# Altium PCB WheatstoneBridge.PcbDoc
Units mm, origin at the board's own origin, x right, y up, seen from the top; angles counter-clockwise.
Board outline 70 x 45 mm, 2 copper layers (Top Layer, Bottom Layer), stack 1.671 mm thick; 66 components, 51 nets, 217 pads, 151 vias.
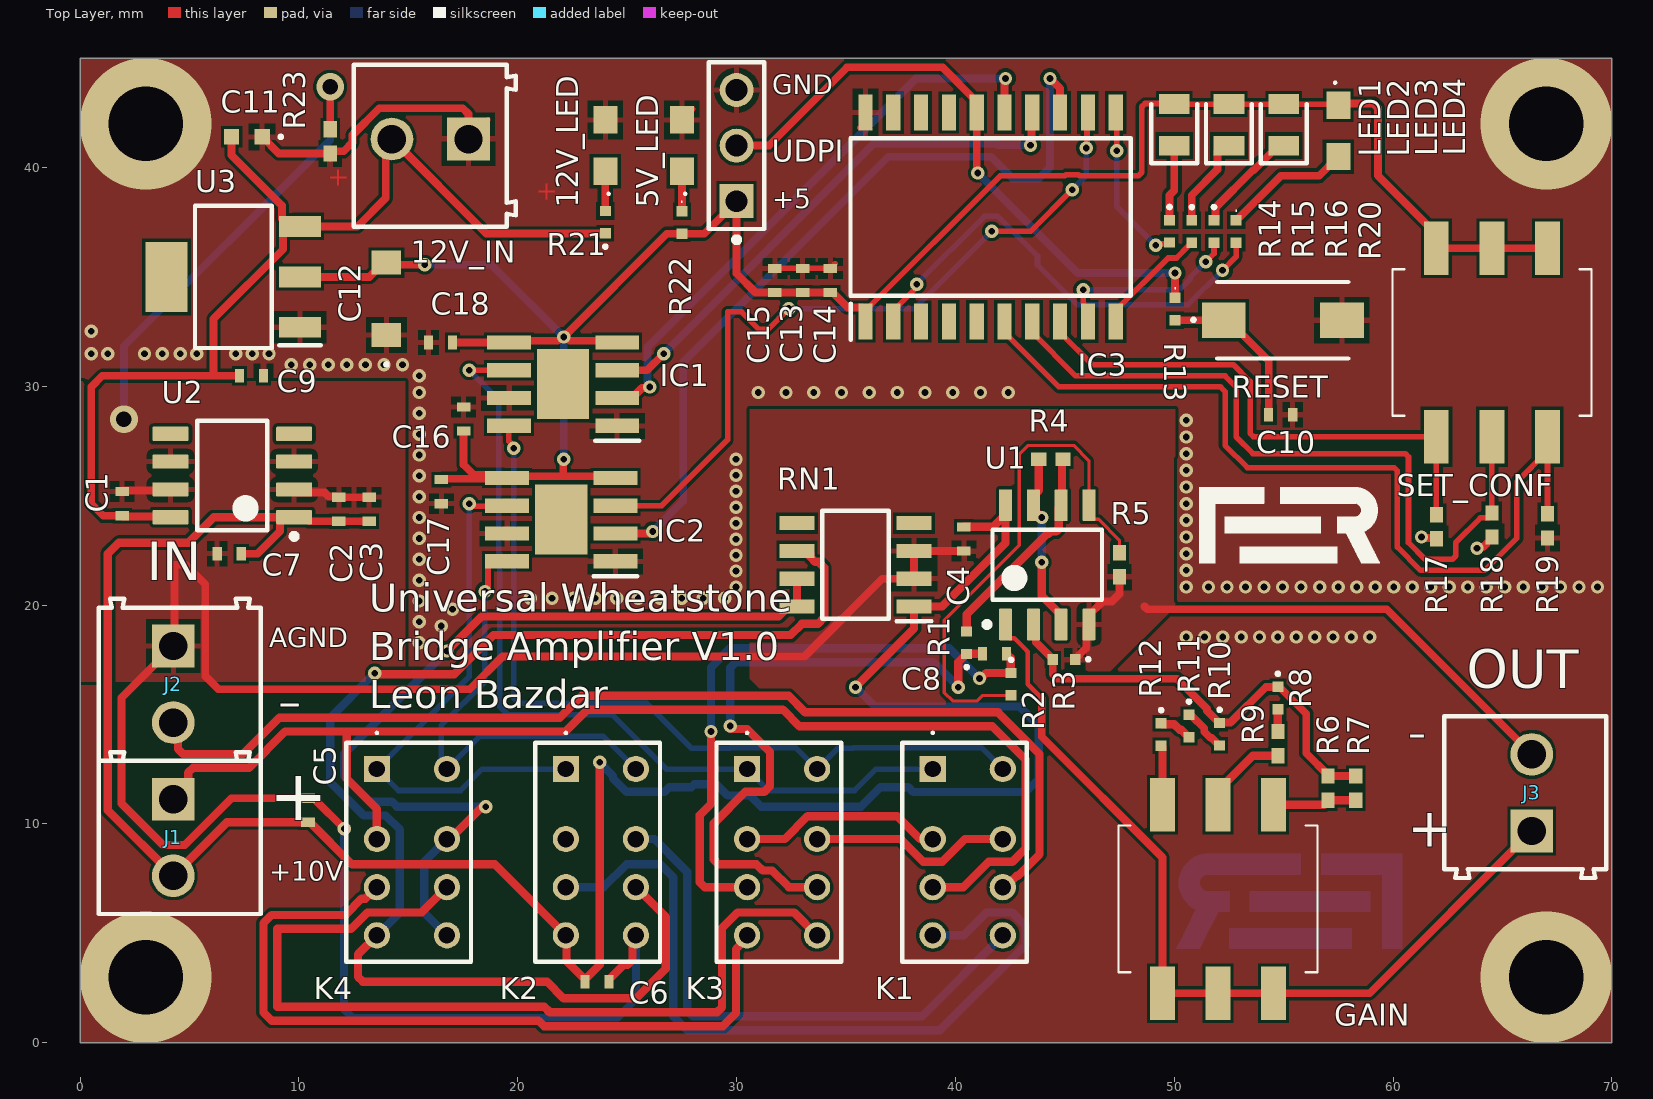
[diagram p0: Top Layer view]
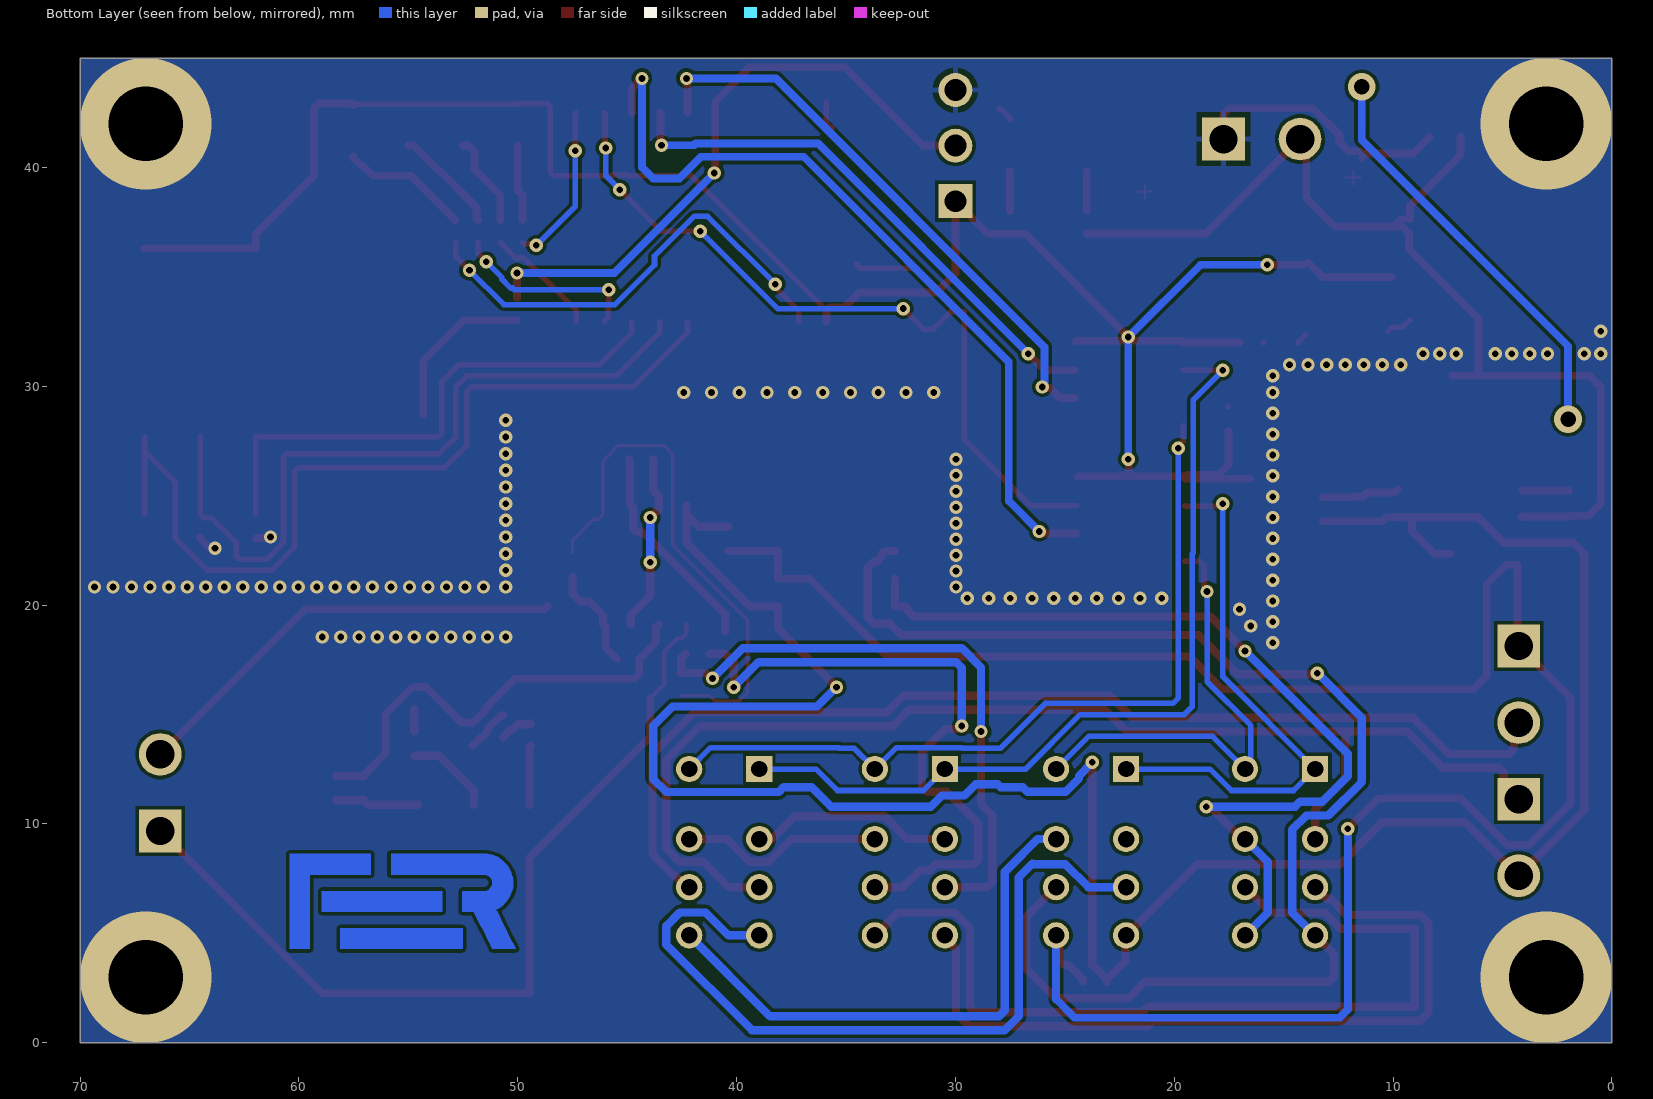
[diagram p1: Bottom Layer view, seen from below]
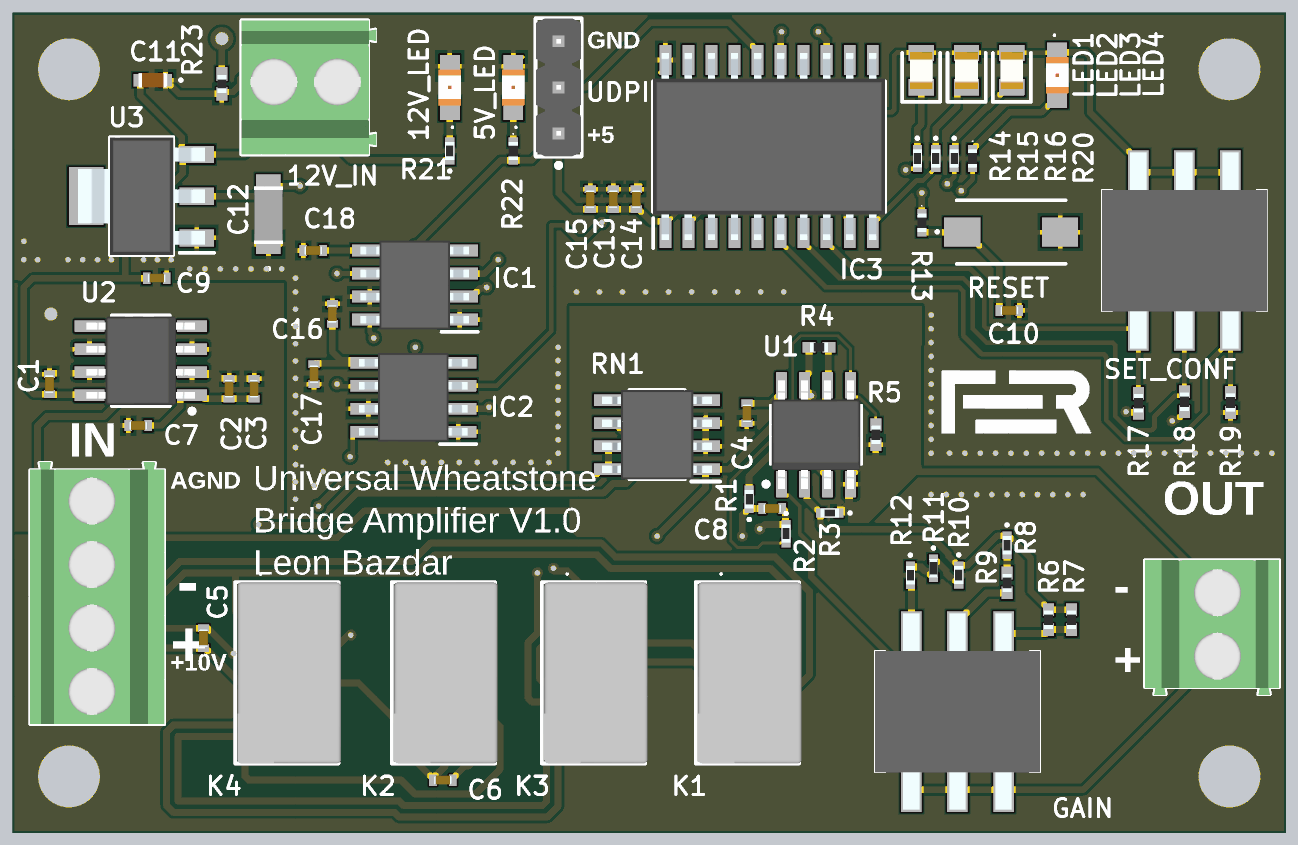
[diagram p2: 3D render of the assembled board from above, using the file's embedded part models]

## Layer stack, top to bottom
Top Solder: solder mask 0.0102, Solder Resist, Dk 3.5
Top Layer: signal copper 0.0356
Dielectric 1: dielectric 1.6, FR-4, Dk 4.8
Bottom Layer: signal copper 0.0356
Bottom Solder: solder mask 0.0102, Solder Resist, Dk 3.5

## Board outline
0,0 70,0 70,45 0,45

## Design rules (kind name [scope] priority, off if disabled: settings)
Clearance [All] p1: gap=0.152 ignorepadtopadclearanceinfootprint=FALSE except(0: Arc-Hole Track-Hole SMDPad-Hole THPad-Hole Via-Hole Fill-Hole Poly-Hole Region-Hole Text-Hole)
ComponentClearance ComponentClearance_1 [InComponent('J1') vs InComponent('J2')] p1: gap=0 collisioncheckmode=3 verticalgap=0 showdistances=TRUE
ComponentClearance [All] p2: gap=0.254 collisioncheckmode=3 verticalgap=0.254 showdistances=TRUE
DiffPairsRouting [All] p1: maxlimit=0.254 minlimit=0.254 mostfreqgap=0.254 toplayer_minwidth=0.381 toplayer_maxwidth=0.381 toplayer_prefwidth=0.381 bottomlayer_minwidth=0.381 bottomlayer_maxwidth=0.381 bottomlayer_prefwidth=0.381 maxuncoupledlength=12.7
HoleSize [All] p1: absolutevalues=TRUE maxlimit=25.4 minlimit=0.025 maxpercent=80.000 minpercent=20.000
MinimumSolderMaskSliver [All] p1: minsoldermaskwidth=0
PolygonConnect PolygonConnect_2 [IsVia vs IsNamedPolygon('AGND_L01_P000')OR IsNamedPolygon('AGND_L01_P001')] p1: connectstyle=Direct reliefconductorwidth=0.254 reliefentries=4 polygonreliefangle="90 Angle" airgapwidth=0.254
PolygonConnect PolygonConnect_1 [IsVia vs IsNamedPolygon('GND_L01_P003')Or IsNamedPolygon('GND_L02_P002')] p2: connectstyle=Direct reliefconductorwidth=0.254 reliefentries=4 polygonreliefangle="90 Angle" airgapwidth=0.254
PolygonConnect [All] p3: connectstyle=Relief reliefconductorwidth=0.254 reliefentries=4 polygonreliefangle="90 Angle" airgapwidth=0.254
RoutingVias [All] p1: holewidth=0.305 width=0.61 viastyle="Through Hole" minholewidth=0.305 minwidth=0.356 maxholewidth=2.54 maxwidth=5.08
SilkToSilkClearance [All] p1: silktosilkclearance=0.152
SilkToSolderMaskClearance [IsPad] p1: minsilkscreentomaskgap=0.152 clearancetoexposedcopper=TRUE
SolderMaskExpansion [All] p1: expansion=0.102 istentingtop=FALSE
Width [All] p1: maxlimit=2.54 minlimit=0.152 preferedwidth=0.254
24 further rules are at their usual default settings.

## Classes and differential pairs
component class "U_Relay Control": C16 C17 IC1 IC2
component class U_PSU: 5V_LED 12V_LED C1 C2 C3 C4 C5 C6 C7 C9 C11 C12 C18 R21 R22 R23 U2 U3
component class U_MCU: C10 C13 C14 C15 IC3 LED1 LED2 LED3 LED4 R13 R14 R15 R16 R17 R18 R19 R20 RESET SET_CONF
component class U_Connectors: 12V_IN J1 J2 J3 UDPI
component class "U_Bridge & Switching": K1 K2 K3 K4 RN1
component class U_Amplifier: C8 GAIN R1 R2 R3 R4 R5 R6 R7 R8 R9 R10 R11 R12 U1
differential pair IN: +IN_P -IN_N
differential pair PART_BR_IN: +PART_BR_IN_P -PART_BR_IN_N
differential pair PART2_BR: +PART2_BR_P -PART2_BR_N
differential pair FULL_BR: +FULL_BR_P -FULL_BR_N
differential pair AMP_IN: +AMP_IN_P -AMP_IN_N

## Components (designator, comment, footprint, x,y, rotation, side; value= is the part's Value field where it differs from the comment)
5V_LED "Red" APT2012SECKJ3PRV 27.5,41 r90 top (schematic designator 5V_PWR)
12V_IN "691214110002" 691214110002 16,41 r180 top (schematic designator PWR_IN)
12V_LED "Red" APT2012SECKJ3PRV 24,41 r90 top (schematic designator 12V_PWR)
C1 "1uF" CAPC1005X55N 1.922,24.638 r270 top
C2 "1uF" CAPC1005X55N 11.828,24.384 r270 top
C3 "100nF" CAPC1005X55N 13.208,24.384 r270 top
C4 "100nF" CAPC1005X55N 40.386,23.029 r90 top
C5 "100nF" CAPC1005X55N 10.414,10.626 r270 top
C6 "100nF" CAPC1005X55N 23.622,2.794 r180 top
C7 "100nF" CAPC1005X55N 6.816,22.352 r0 top
C8 "1nF C0G" CAPC1005X55N 41.783,17.78 r180 top
C9 "1uF" CAPC1005X55N 7.832,30.48 r180 top
C10 "100nF" CAPC1005X55N 54.864,28.702 r180 top
C11 "10uF" C1608_Commercial 7.62,41.402 r180 top
C12 "22uF" C3216_Commercial 14,34 r90 top
C13 "1uF" CAPC1005X55N 33.02,34.84 r270 top
C14 "100nF" CAPC1005X55N 34.29,34.84 r270 top
C15 "1nF" CAPC1005X55N 31.75,34.84 r270 top
C16 "100nF" CAPC1005X55N 17.526,28.507 r270 top
C17 "100nF" CAPC1005X55N 16.51,25.188 r90 top
C18 "100nF" CAPC1005X55N 16.468,32.004 r0 top
GAIN "DIP SWITCH" 2193LPSTR 52,6.575 r180 top
IC1 "TB67H451FNG,EL" SOIC127P600X170-9N 22.069,30.099 r180 top
IC2 "TB67H451FNG,EL" SOIC127P600X170-9N 21.988,23.908 r180 top
IC3 "ATTINY1626-SF" SOIC127P1030X265-20N 41.608,37.736 r90 top
J1 "691214110002" 691214110002 4.56,9.385 r270 top
J2 "691214110002" 691214110002 4.56,16.385 r270 top
J3 "691214110002" 691214110002 66.04,11.43 r90 top
K1 "2-1462038-1" 214620381 38.964,12.512 r270 top
K2 "2-1462038-1" 214620381 22.2,12.512 r270 top
K3 "2-1462038-1" 214620381 30.48,12.512 r270 top
K4 "2-1462038-1" 214620381 13.564,12.512 r270 top
LED1 "Blue" LEDC2012X85N 50,41.95 r90 top
LED2 "Blue" LEDC2012X85N 52.5,41.95 r90 top
LED3 "Blue" LEDC2012X85N 55,41.95 r90 top
LED4 "Red" APT2012SECKJ3PRV 57.5,41.675 r270 top
R1 "1k" ERA2V_(0402) 40.513,18.283 r90 top
R2 "1k" ERA2V_(0402) 42.545,16.388 r270 top
R3 "1k" ERA2V_(0402) 44.958,17.526 r180 top
R4 "150k" RESC1005X35N 44.365,26.67 r180 top
R5 "150k" RESC1005X35N 47.498,21.844 r90 top
R6 "18k" RESC1005X35N 57.023,11.642 r270 top
R7 "18k" RESC1005X35N 58.293,11.642 r270 top
R8 "1k" ERA2V_(0402) 54.737,15.752 r270 top
R9 "18k" RESC1005X35N 54.737,13.674 r270 top
R10 "1k" ERA2V_(0402) 52.07,14.101 r270 top
R11 "47k" ERA2A_(0402) 50.673,14.483 r270 top
R12 "1k" ERA2V_(0402) 49.403,14.092 r270 top
R13 "330R" ERJ2RKD1004X 50.038,33.532 r270 top
R14 "1k" ERA2V_(0402) 49.784,37.084 r270 top
R15 "1k" ERA2V_(0402) 50.8,37.079 r270 top
R16 "1k" ERA2V_(0402) 51.816,37.079 r270 top
R17 "18k" RESC1005X35N 61.976,23.58 r90 top
R18 "18k" RESC1005X35N 64.516,23.664 r90 top
R19 "18k" RESC1005X35N 67.056,23.622 r90 top
R20 "330R" ERJ2RKD1004X 52.832,37.08 r270 top
R21 "1k" ERA2V_(0402) 24,37.5 r90 top
R22 "330R" ERJ2RKD1004X 27.5,37.488 r270 top
R23 "0R" RESC1005X40N 11.43,41.19 r90 top
RESET "SW1" 95C04A3GWRT 54.96,33.02 r0 top
RN1 "ORNTA1001BT1" SOIC127P607X173-8N 35.433,21.844 r180 top
SET_CONF "DIP SWITCH" 2193LPSTR 64.516,32.004 r0 top
U1 "LMC6482IM/NOPB" D0008A_N 44.196,21.844 r90 top
U2 "TL750L10CD" D0008A_M 6.958,25.926 r180 top
U3 "AZ1117H-5.0TRG1" SOT230P700X180-4N 7,35 r180 top
UDPI "90120-0123" FP-90120-0123-MFG 30,41 r90 top

## Footprints (in the part's own frame and the unit in brackets; to place one, negate y for a bottom-side part, rotate by r counter-clockwise, add the part's x,y. Pads: shape width x height; smd on the part's side, far side on the other; paste and mask are expansions set on the pad)
95C04A3GWRT [mm]
  rect 2x1.6 smd: 1(-2.7,0) 2(2.7,0)
  silkscreen extent -4.13,-1.75 3,1.75
2193LPSTR [mm]
  rect 1.13x2.44 smd: 1(-2.54,-4.305) 2(0,-4.305) 3(2.54,-4.305) 4(2.54,4.305) 5(0,4.305) 6(-2.54,4.305)
  silkscreen extent -4.55,-3.35 4.54,3.35, body extent -4.54,-5.41 4.54,5.41, height 4.05
214620381 [mm]
  rect 1.2x1.2 hole 0.75: 1(0,0)
  round 1.2 hole 0.75: 2(3.2,0) 3(5.4,0) 4(7.6,0) 5(7.6,3.2) 6(5.4,3.2) 7(3.2,3.2) 8(0,3.2)
  silkscreen extent -1.7,-1.4 8.8,4.3, body extent -1.2,-1.27 8.8,4.43, height 5.7
691214110002 [mm] "3.50 mm Horizontal Entry Modular, 2p"
  rect 1.95x1.95 hole 1.3: 1(-1.75,-0.3)
  round 1.95 hole 1.3: 2(1.75,-0.3)
  silkscreen extent -3.9,-3.7 3.5,3.7, body extent -3.95,-3.7 3.5,3.7, height 8.55
APT2012SECKJ3PRV [mm]
  rect 1.25x1.1 smd: 1(-1.175,0) 2(1.175,0)
  silkscreen extent -2.25,-0.2 -2.15,-0.1, body extent -1,-0.63 1,0.63, height 0.85
C1608_Commercial [mm]
  rect 0.7x0.7 smd: 1(-0.7,0) 2(0.7,0)
  silkscreen extent -1.6,-0.05 -1.5,0.05, body extent -0.8,-0.4 0.8,0.4, height 0.8
C3216_Commercial [mm]
  rect 1.1x1.35 smd: 1(-1.65,0) 2(1.65,0)
  silkscreen extent -3.05,-0.05 -2.95,0.05, body extent -1.65,-0.8 1.55,0.8, height 1.6
CAPC1005X55N [mm]
  rect 0.42x0.62 smd: 1(-0.55,0) 2(0.55,0)
  body extent -0.5,-0.25 0.5,0.25, height 0.55
D0008A_M [mm] "SOIC, 8-Leads, Body 5x4mm, Pitch 1.27mm, IPC Low Density"
  rrect15% 1.65x0.65 smd: 1(-2.825,1.905) 2(-2.825,0.635) 3(-2.825,-0.635) 4(-2.825,-1.905) 5(2.825,-1.905) 6(2.825,-0.635) 7(2.825,0.635) 8(2.825,1.905)
  silkscreen extent -2.95,-2.5 1.6,2.9, body extent -3,-2.45 3,2.45, height 1.63
D0008A_N [mm] "SOIC, 8-Leads, Body 5x4mm, Pitch 1.27mm, IPC Medium Density"
  rrect17% 1.45x0.6 smd: 1(-2.725,1.905) 2(-2.725,0.635) 3(-2.725,-0.635) 4(-2.725,-1.905) 5(2.725,-1.905) 6(2.725,-0.635) 7(2.725,0.635) 8(2.725,1.905)
  silkscreen extent -2.85,-2.5 1.6,2.88, body extent -3,-2.45 3,2.45, height 1.63
ERA2A_(0402) [mm]
  rect 0.475x0.5 smd: 1(-0.512,0) 2(0.513,0)
  silkscreen extent -1.16,-0.05 -1.06,0.05, body extent -0.5,-0.25 0.5,0.25, height 0.35
ERA2V_(0402) [mm]
  rect 0.475x0.5 smd: 1(-0.513,0) 2(0.513,0)
  silkscreen extent -1.16,-0.05 -1.06,0.05, body extent -0.5,-0.25 0.5,0.25, height 0.36
ERJ2RKD1004X [mm]
  rect 0.475x0.5 smd: 1(-0.512,0) 2(0.512,0)
  silkscreen extent -0.97,-0.03 -0.93,0.03, body extent -0.5,-0.25 0.5,0.25, height 0.35
FP-90120-0123-MFG [mm]
  rect 1.55x1.55 hole 1 paste-1000 mask+0: 1(-2.54,0)
  round 1.55 hole 1 paste-1000 mask+0: 2(0,0) 3(2.54,0)
  silkscreen extent -4.42,-1.27 3.81,1.27, body extent -3.91,-1.37 3.91,1.37, height 0.25
LEDC2012X85N [mm]
  rect 0.9x1.4 smd: 1(-0.95,0) 2(0.95,0)
  silkscreen extent -1.75,-1.05 0.95,1.05, body extent -1.05,-0.63 0.99,0.63, height 0.77
RESC1005X35N [mm]
  rect 0.7x0.6 smd: 1(-0.55,0) 2(0.55,0)
  body extent -0.5,-0.25 0.5,0.25, height 0.35
RESC1005X40N [mm]
  rect 0.75x0.6 smd: 1(-0.55,0) 2(0.55,0)
  body extent -0.5,-0.25 0.5,0.25, height 0.4
SOIC127P600X170-9N [mm]
  rect 2x0.65 smd: 1(-2.475,1.905) 2(-2.475,0.635) 3(-2.475,-0.635) 4(-2.475,-1.905) 5(2.475,-1.905) 6(2.475,-0.635) 7(2.475,0.635) 8(2.475,1.905)
  rect 2.39x3.2 smd: 9(0,0)
  silkscreen extent -3.48,2.58 -1.48,2.58, body extent -3,-2.45 3,2.45, height 1.7
SOIC127P607X173-8N [mm]
  rect 1.6x0.65 smd: 1(-2.675,1.905) 2(-2.675,0.635) 3(-2.675,-0.635) 4(-2.675,-1.905) 5(2.675,-1.905) 6(2.675,-0.635) 7(2.675,0.635) 8(2.675,1.905)
  silkscreen extent -3.47,-2.47 1.52,2.58, body extent -3.04,-2.46 3.04,2.46, height 1.73
SOIC127P1030X265-20N [mm]
  rect 1.65x0.65 smd: 1(-4.775,5.715) 2(-4.775,4.445) 3(-4.775,3.175) 4(-4.775,1.905) 5(-4.775,0.635) 6(-4.775,-0.635) 7(-4.775,-1.905) 8(-4.775,-3.175) 9(-4.775,-4.445) 10(-4.775,-5.715) 11(4.775,-5.715) 12(4.775,-4.445) 13(4.775,-3.175) 14(4.775,-1.905) 15(4.775,-0.635) 16(4.775,0.635) 17(4.775,1.905) 18(4.775,3.175) 19(4.775,4.445) 20(4.775,5.715)
  silkscreen extent -5.6,-6.4 3.6,6.4, body extent -5.15,-6.4 5.15,6.4, height 2.65
SOT230P700X180-4N [mm]
  rect 1.9x0.95 smd: 1(-3.05,2.3) 2(-3.05,0) 3(-3.05,-2.3)
  rect 1.9x3.2 smd: 4(3.05,0)
  silkscreen extent -4,-3.25 1.75,3.25, body extent -3.5,-3.25 3.5,3.25, height 1.8

## Part data
5V_LED 12V_LED LED4: library part APT2012SECK_J3-PRV, "LED", Manufacturer_Name=Kingbright, Manufacturer_Part_Number=APT2012SECK/J3-PRV, Datasheet Link=https://www.mouser.de/datasheet/2/216/APT2012SECK-J3-PRV-1173389.pdf, Height=0.85mm
12V_IN J1 J2 J3: library part CMP-1502-02464-1, "Serie 2141 - 3.50 mm Horizontal Entry Modular with Rising Cage Clamp WR-TBL, 2 pin", Manufacturer="Wurth Elektronik", Operating Temperature=-40to105degC, Datasheet URL=http://katalog.we-online.de/em/datasheet/6912141100xx.pdf, Manufacturer URL=http://www.we-online.de, Mounting Technology=THT, Package Reference=691214110002, Packaging=Box, Part Number=691214110002, Pin Number=2, Pitch=3.50mm, Publisher=WurthElektronik
C1 C2 C9 C13: library part GRT155C81E105KE13D, "Capacitor", Manufacturer_Name="Murata Electronics", Datasheet Link=https://psearch.en.murata.com/capacitor/product/GRT155C81E105KE13%23.html, Height=0.55mm, Manufacturer_Part_Number=GRT155C81E105KE13D
C3 C4 C5 C6 C7 C10 C14 C16 C17 C18: library part GCM155L81E104KE02D, "Capacitor", Manufacturer_Name="Murata Electronics", Datasheet Link=https://psearch.en.murata.com/capacitor/product/GCM155L81E104KE02%23.html, Height=0.55mm, Manufacturer_Part_Number=GCM155L81E104KE02D
C8 C15: library part CGA2B2C0G1H102J050BE, "Capacitor", Manufacturer_Name=TDK, Datasheet Link=https://product.tdk.com/system/files/dam/doc/product/capacitor/ceramic/mlcc/catalog/mlcc_automotive_soft_en.pdf, Height=0.55mm, Manufacturer_Part_Number=CGA2B2C0G1H102J050BE
C11: library part C1608JB1E106M080AC, "Capacitor", Manufacturer_Name=TDK, Datasheet Link=https://product.tdk.com/system/files/dam/doc/product/capacitor/ceramic/mlcc/catalog/mlcc_commercial_general_en.pdf, Height=0.9mm, Manufacturer_Part_Number=C1608JB1E106M080AC
C12: library part C3216X6S1E226M160AC, "Capacitor", Manufacturer_Name=TDK, Datasheet Link=https://product.tdk.com/system/files/dam/doc/product/capacitor/ceramic/mlcc/catalog/mlcc_commercial_general_en.pdf, Height=0.75mm, Manufacturer_Part_Number=C3216X6S1E226M160AC
GAIN SET_CONF: library part 219-3LPSTR, "Switch", Manufacturer_Name=CTS, Datasheet Link=https://www.ctscorp.com/wp-content/uploads/219.pdf, Height=3.95mm, Manufacturer_Part_Number=219-3LPSTR
IC1 IC2: "Integrated Circuit", Manufacturer_Name=Toshiba, Datasheet Link=https://www.mouser.it/datasheet/2/408/TB67H451FNG_datasheet_en_20191111-1713881.pdf, Height=1.7mm, Manufacturer_Part_Number=TB67H451FNG,EL
IC3: "Integrated Circuit", Manufacturer_Name=Microchip, Datasheet Link=https://ww1.microchip.com/downloads/aemDocuments/documents/MCU08/ProductDocuments/DataSheets/ATtiny1624-26-27-DataSheet-DS40002234B.pdf, Height=2.65mm, Manufacturer_Part_Number=ATTINY1626-SF
K1 K2 K3 K4: "Relay or Contactor", Manufacturer_Name="TE Connectivity", Datasheet Link=https://www.te.com/commerce/DocumentDelivery/DDEController?Action=srchrtrv&DocNm=108-98001&DocType=Data+Sheet&DocLang=English&PartCntxt=2-1462038-1&DocFormat=pdf, Height=5.8mm, Manufacturer_Part_Number=2-1462038-1
LED1 LED2 LED3: library part APT2012LVBC_D, "LED", Manufacturer_Name=Kingbright, Manufacturer_Part_Number=APT2012LVBC/D, Mouser2 Part Number=604-APT2012LVBCD, Datasheet Link=https://componentsearchengine.com//APT2012LVBC_D.pdf, Height=0.85mm, Mouser2 Price/Stock=https://www.mouser.com/Search/Refine.aspx?Keyword=604-APT2012LVBCD
R1 R2 R3 R8 R10 R12 R14 R15 R16 R21: library part ERA-2VEB1001X, "Resistor", Manufacturer_Name=Panasonic, Datasheet Link=http://industrial.panasonic.com/cdbs/www-data/pdf/RDM0000/RDM0000C331.pdf, Height=0.4mm, Manufacturer_Part_Number=ERA-2VEB1001X
R4 R5: library part CPF0402B150KE1, "Resistor", Manufacturer_Name="TE Connectivity", Height=0.35mm, Manufacturer_Part_Number=CPF0402B150KE1
R6 R7 R9 R17 R18 R19: library part CPF0402B18KE1, "Resistor", Manufacturer_Name="TE Connectivity", Height=0.35mm, Manufacturer_Part_Number=CPF0402B18KE1
R11: library part ERA-2APB473X, "Resistor", Manufacturer_Name=Panasonic, Datasheet Link=http://industrial.panasonic.com/cdbs/www-data/pdf/RDM0000/AOA0000C307.pdf, Height=0.4mm, Manufacturer_Part_Number=ERA-2APB473X
R13 R20 R22: library part ERJ-2RHD3300X, "Resistor", Manufacturer_Name=Panasonic, Datasheet Link=https://datasheet.datasheetarchive.com/originals/distributors/DKDS41/DSANUWW0038499.pdf, Height=0.4mm, Manufacturer_Part_Number=ERJ-2RHD3300X
R23: library part RC0402JR-130RL, "Resistor", Manufacturer_Name="YAGEO (PHYCOMP)", Datasheet Link=https://datasheet.datasheetarchive.com/originals/distributors/Datasheets_SAMA/902f9e387b938f871d31120f5fc1d65e.pdf, Height=0.4mm, Manufacturer_Part_Number=RC0402JR-130RL
RESET: library part 95C04A3GWRT, "Switch", Manufacturer_Name=Grayhill, Mouser2 Part Number=706-95C04A3GWRT, Datasheet Link=https://componentsearchengine.com//95C04A3GWRT.pdf, Manufacturer_Part_Number=95C04A3GWRT, Mouser2 Price/Stock=https://www.mouser.com/Search/Refine.aspx?Keyword=706-95C04A3GWRT
RN1: "Resistor Network", Manufacturer_Name=Vishay, Mouser Part Number=71-ORNTA1001BT1, Datasheet Link=https://www.vishay.com/docs/60005/orn.pdf, Height=1.73mm, Manufacturer_Part_Number=ORNTA1001BT1, Mouser Price/Stock=https://www.mouser.co.uk/ProductDetail/Vishay-Thin-Film/ORNTA1001BT1?qs=EiQZnNXpF8A9ZYJTqcYggA%3D%3D
U1: library part CMP-0055-00847-3, "CMOS Dual Rail-to-Rail Input and Output Operational Amplifier, 8-pin Narrow SOIC, Pb-Free", Manufacturer="Texas Instruments", Package Reference=D0008A, PackageTopMarking=NSZXTT*LMC64*82IM, PowerWise=N, Code_IPC=SOIC127P600-8, Code_JEDEC=MS-012-AA, ComponentLink1Description="Datasheet URL", ComponentLink1URL=http://www.ti.com/general/docs/lit/getliterature.tsp?genericPartNumber=LMC6482&fileType=pdf, CompType=Amplifiers, PackageDescription="SOIC Narrow, 4.9 x 3.9 x 1.45mm, 8 Lead, 1.27mm Pitch", PinCount=8, RoHS=Y
U2: library part CMP-0394-00106-2, "Single Output LDO, 150 mA, Fixed 10 V Output, 11 to 26 V Input, with Low IQ, 8-pin SOIC (D), 0 to 125 degC, Green (RoHS & no Sb/Br)", Manufacturer="Texas Instruments", Rating=Catalog, Accuracy(%)=4, Code_JEDEC=MS-012, ComponentLink1Description="Manufacturer URL", ComponentLink1URL=http://www.ti.com/, ComponentLink2Description=Datasheet, ComponentLink2URL=http://www.ti.com/general/docs/lit/getliterature.tsp?genericPartNumber=TL750L10&fileType=pdf, ComponentLink3Description="Package Specification", ComponentLink3URL=http://www.ti.com/litv/pdf/msoi002j, ComponentLink4Description="URL Link1", ComponentLink4URL="Samples URL:http://www.ti.com/product/tl750l10#samples", DatasheetVersion=SLVS017U, Eco-Plan="Green (RoHS & no Sb/Br)", Fixed Output Options(V)=10, Iout(Max)(A)=0.15, Iq(Typ)(mA)=1, Mounting Technology="Surface Mount", PackageDescription="8-Pin Plastic Small Outline, Body 4.9 x 3.9 mm, Pitch 1.27 mm", PackageReference=D0008A, PackageVersion=4040047-3/M, PartNumber=TL750L10CD, SubFamily="Single Channel LDO", Vdo(Typ)(mV)=600, Vin(Max)(V)=26, Vin(Min)(V)=11, Vout Adj(Max)(V)=10, Vout Adj(Min)(V)=10
U3: "Integrated Circuit", Manufacturer_Name="Diodes Inc.", Datasheet Link=https://media.digikey.com/pdf/Data%20Sheets/Diodes%20PDFs/AZ1117_Rev2.1.pdf, Height=1.8mm, Manufacturer_Part_Number=AZ1117H-5.0TRG1
UDPI: library part CMP-04776-000237-1, "CONN HEADER VERT 3POS 2.54MM", Color=Black, Contact Resistance=20mR, Current Rating=3A, Max Operating Temperature=125°C, Max Voltage Rating (DC)=350.35kV, Min Operating Temperature=-55°C, Voltage Rating=350V, Contact Gender=Male, Contact Material=Brass, Contact Mating Length=6.75mm, Contact Plating=Tin, Contact Post Length=2.9mm, Gender=Male, Glow Wire Compliant=Non-compliant, Housing Color=Black, Housing Material=Polyester, Lead Free="Lead Free", Mount="Through Hole", Number of Circuits=3, Number of Contacts=3, Number of Positions=3, Number of Rows=1, Orientation=Vertical, Packaging=Tray, Pitch=2.54mm, Radiation Hardening=No, REACH SVHC="No SVHC", RoHS Compliant=Yes, Series=90120, Termination=Solder, Voltage Rating (AC)=350V

## Via types
v1: diameter 0.61, hole 0.305, Top Layer to Bottom Layer, tented top, 145 vias
v2: diameter 6, hole 3.4, Top Layer to Bottom Layer, 4 vias
v3: diameter 1.27, hole 0.711, Top Layer to Bottom Layer, tented top, 2 vias

## Nets (pads, with @x,y where several pads share a name; then routed paths per layer and width w, separated by ;. In a path a pad name is that pad's centre, name@x,y a point inside that pad or via, vN(x,y) a via of type N, cw(c..) or ccw(c..) an arc to the next point about the centre after c; other vN are vias at no path point)
+5: C12.2 C13.2 C14.2 C15.2 C16.2 C17.2 C18.2 IC1.4 IC1.5 IC2.4 IC2.5 IC3.1 LED1.2 LED2.2 LED3.2 LED4.1 R22.2 SET_CONF.4 SET_CONF.5 SET_CONF.6 U3.2 UDPI.1 | length 102.5
  Top Layer w0.254: C12.2@13.875,35.65 C12.2 C12.2@14.09,35.56 ; C17.2 C17.2@16.548,25.775 ; IC2.5@19.475,25.775 IC2.5 IC2.5@19.589,25.889 ; IC1.5 IC1.5@19.67,32.08 ; 21.824,32.08 22.002,32.258 v1(22.098,32.258) 22.194,32.258 22.372,32.08 ; 21.988,25.889 22.083,25.984 ; v1@22.083,26.655 v1(22.098,26.67) ; IC2.4@24.387,25.889 IC2.4 ; IC1.4@24.468,32.08 IC1.4 ; IC3.1@35.893,33.461 42.056,39.624 45.004,39.624 45.055,39.675 45.623,39.675 45.674,39.624 48.365,39.624 48.514,39.773 48.514,42.777 48.663,42.926 49.974,42.926 LED1.2 LED2.2 LED3.2 57.45,42.9 LED4.1
  Top Layer w0.356: U3.2 13.225,35 C12.2@13.875,35.65 ; C12.2@14.09,35.56 v1(15.748,35.56) ; C17.2@16.548,25.775 IC2.5@19.475,25.775 ; C18.2 IC1.5 ; C16.2 17.526,26.416 17.982,25.96 19.366,25.96 IC2.5 ; IC2.5@19.589,25.889 21.988,25.889 IC2.4@24.387,25.889 ; IC1.5@19.67,32.08 21.824,32.08 ; 22.083,25.984 v1@22.083,26.655 ; v1(22.098,32.258) 26.816,36.976 R22.2 28.516,36.976 UDPI.1 30,35.151 30.861,34.29 C15.2 C13.2 C14.2 34.39,34.29 35.072,33.608 35.746,33.608 35.893,33.461 IC3.1 ; 22.372,32.08 IC1.4@24.468,32.08 ; LED4.1 57.576,42.926 59.101,42.926 59.309,42.718 59.309,39.631 61.976,36.964 SET_CONF.6 SET_CONF.5 SET_CONF.4
  Bottom Layer w0.356: v1(15.748,35.56) 18.796,35.56 v1(22.098,32.258) v1(22.098,26.67)
+12: 12V_IN.2 C1.2 C9.2 C11.2 R21.1 U2.8 U3.3 | length 49.4
  Top Layer w0.254: C1.2 C1.2@1.956,24.054 ; U2.8@4.099,24.054 U2.8 ; U3.3@9.227,37.648 9.702,37.648 U3.3 ; 12V_IN.2@13.97,41.02 12V_IN.2
  Top Layer w0.356: C1.2 1.058,24.088 0.508,24.638 0.508,29.972 1.016,30.48 6.096,30.48 ; C1.2@1.956,24.054 U2.8@4.099,24.054 ; U2.8 U2.8@4.146,24.033 ; C11.2 6.92,40.567 9.227,38.26 U3.3@9.227,37.648 ; C9.2 6.096,30.48 ; 12V_IN.2@13.97,41.02 13.97,38.608 12.662,37.3 U3.3 9.575,37.3 9.278,37.003 9.278,36.263 6.096,33.082 6.096,30.48 ; 12V_IN.2 18.563,36.987 R21.1
AGND: C1.1 C2.1 C3.1 C4.1 C5.1 C6.1 C7.1 J2.1 J3.2 K2.5 R3.1 R5.1 R23.2 RN1.2 RN1.3 U1.4 U2.2 U2.3 U2.6 U2.7 | length 148.6
  Top Layer w0.254: C1.1 C1.1@1.973,25.239 ; U2.7@4.082,25.239 U2.7
  Top Layer w0.356: C1.1@1.973,25.239 U2.7@4.082,25.239 ; U2.2 9.928,25.146 11.176,25.146 11.356,24.966 11.796,24.966 C2.1 C3.1 ; R23.2 v3(11.43,43.688) ; v1(12.065,9.779) 10.7,11.144 10.446,11.144 C5.1 6.921,11.176 4.787,9.042 3.785,9.042 1.892,10.935 1.892,15.767 J2.1 4.318,18.193 4.318,21.844 4.826,21.844 5.715,20.955 5.715,16.764 6.325,16.154 17.805,16.154 19.304,17.653 33.106,17.653 36.662,21.209 RN1.2 RN1.3 C4.1 ; C6.1 24.172,2.894 24.834,3.556 25.019,3.556 25.242,3.779 25.242,4.754 K2.5 ; R3.1 45.471,17.538 45.979,18.047 45.979,18.997 U1.4 46.101,19.544 46.726,20.169 47.151,20.169 47.498,20.516 R5.1 ; 48.641,19.939 48.768,19.812 59.708,19.812 J3.2
  Bottom Layer w0.356: v3(2,28.5) 2,31.828 11.43,41.258 v3(11.43,43.688) ; v1(12.065,9.779) 12.065,1.524 12.446,1.143 24.557,1.143 25.4,1.986 K2.5
AMP_IN_N: C8.2 K3.6 R1.1 | length 30.2
  Top Layer w0.381: v1(29.718,14.478) 29.718,14.338 30.482,14.338 31.525,13.296 31.525,11.728 31.264,11.467 30.39,11.467 28.956,10.033 28.956,8.38 29.179,8.157 30.913,8.157 31.195,7.874 31.623,7.874 32.385,7.112 K3.6 ; v1(40.132,16.256) 40.132,17.402 40.501,17.771 R1.1 40.522,17.78 C8.2
  Bottom Layer w0.381: v1(29.718,14.478) 29.718,17.145 29.972,17.399 38.989,17.399 v1(40.132,16.256)
AMP_IN_P: C8.1 K3.3 R2.1 | length 28
  Top Layer w0.381: v1(28.829,14.224) 28.829,10.922 28.321,10.414 28.321,7.335 28.544,7.112 K3.3 ; v1(41.097,16.653) 41.159,16.653 41.406,16.9 R2.1 42.522,16.923 42.522,17.591 C8.1
  Bottom Layer w0.381: v1(28.829,14.224) 28.829,17.154 29.709,18.034 39.716,18.034 v1(41.097,16.653)
FULL_BR_N: K1.7 K3.7 | length 9.3
  Top Layer w0.381: K3.7 37.487,9.312 38.531,8.267 39.397,8.267 40.441,9.312 K1.7
FULL_BR_P: K1.2 K3.2 | length 9.3
  Top Layer w0.381: K3.2 32.203,9.312 33.247,10.356 37.34,10.356 38.385,9.312 K1.2
GND: 5V_LED.2 12V_IN.1 12V_LED.2 C9.1 C10.1 C11.1 C12.1 C13.1 C14.1 C15.1 C16.1 C17.1 C18.1 IC1.1 IC1.7 IC2.1 IC2.7 IC3.20 R17.1 R18.1 R19.1 R23.1 RESET.2 U3.1 UDPI.3 | length 21.9
  Top Layer w0.254: U3.1@9.227,33.048 9.575,32.7 U3.1 U3.1@10.238,32.512 ; R23.1@11.43,40.386 R23.1@11.43,40.565 ; C12.1 C12.1@14.346,32.004 ; C18.1 C18.1@15.939,31.983 ; C16.1 C16.1@17.547,29.078 ; 12V_IN.1 12V_IN.1@18.625,42.175 ; 5V_LED.2 27.5,42.25 27.923,42.673 5V_LED.2@27.998,42.673 ; UDPI.3@29.979,43.519 UDPI.3 ; C15.1 C13.1 C14.1 34.39,35.39 34.473,35.473 34.473,35.573 34.5,35.6 ; IC3.20@35.622,41.813 35.695,41.813 35.893,42.011 IC3.20 IC3.20@35.893,43.011
  Top Layer w0.356: C11.1 9.082,40.64 R23.1 11.535,40.745 12.043,40.745 12.446,41.148 12.446,41.485 13.667,42.707 17.491,42.707 17.75,42.448 12V_IN.1 ; v1(61.299,23.114) 61.341,23.072 61.934,23.072 R17.1 ; v1(63.839,22.606) 63.887,22.655 64.107,22.655 64.516,23.064 R18.1
  other v1: 15.494,18.288 50.546,18.542 51.384,18.542 52.222,18.542 53.061,18.542 53.899,18.542 54.737,18.542 55.575,18.542 56.413,18.542 57.252,18.542 58.09,18.542 58.928,18.542 16.51,19.05 15.494,19.241 17.018,19.812 15.494,20.193 20.574,20.32 21.562,20.32 22.55,20.32 23.537,20.32 24.525,20.32 25.513,20.32 26.501,20.32 27.488,20.32 28.476,20.32 29.464,20.32 29.972,20.828 50.546,20.828 51.562,20.828 52.409,20.828 53.255,20.828 54.102,20.828 54.949,20.828 55.795,20.828 56.642,20.828 57.489,20.828 58.335,20.828 59.182,20.828 60.029,20.828 60.875,20.828 61.722,20.828 62.569,20.828 63.415,20.828 64.262,20.828 65.109,20.828 65.955,20.828 66.802,20.828 67.649,20.828 68.495,20.828 69.342,20.828 15.494,21.145 29.972,21.558 50.546,21.59 15.494,22.098 29.972,22.288 50.546,22.352 29.972,23.019 15.494,23.05 50.546,23.114 29.972,23.749 50.546,23.876 15.494,24.003 29.972,24.479 50.546,24.638 15.494,24.956 29.972,25.209 50.546,25.4 15.494,25.908 29.972,25.94 50.546,26.162 29.972,26.67 15.494,26.86 50.546,26.924 50.546,27.686 15.494,27.813 50.546,28.448 15.494,28.765 15.494,29.718 30.988,29.718 32.258,29.718 33.528,29.718 34.798,29.718 36.068,29.718 37.338,29.718 38.608,29.718 39.878,29.718 41.148,29.718 42.418,29.718 15.494,30.48 9.652,30.988 10.499,30.988 11.345,30.988 12.192,30.988 13.039,30.988 13.885,30.988 14.732,30.988 0.508,31.496 1.27,31.496 2.946,31.496 3.759,31.496 4.572,31.496 5.334,31.496 7.112,31.496 7.874,31.496 8.636,31.496 0.508,32.512
  other v2: 3,3 67,3 3,42 67,42
IN_N: J2.2 K1.6 | length 49.9
  Top Layer w0.381: J2.2 4.476,14.419 4.476,13.426 4.699,13.203 7.452,13.203 9.109,14.859 12.192,14.859 21.926,14.859 22.929,15.862 32.376,15.862 33.138,15.1 41.951,15.1 43.844,13.208 43.844,8.616 42.86,7.632 42.797,7.632 42.276,7.112 K1.6
IN_P: J1.1 K1.3 K4.2 | length 56.4
  Top Layer w0.381: J1.1 4.935,11.81 4.935,12.344 5.158,12.568 7.715,12.568 9.372,14.224 12.192,14.224 ; K4.2 13.564,10.683 12.192,12.055 12.192,14.224 ; K1.3 40.36,7.112 41.516,8.267 42.597,8.267 43.209,8.879 43.209,12.945 41.688,14.465 32.875,14.465 32.113,15.227 23.192,15.227 22.189,14.224 12.192,14.224
K13_CTRL_1: IC1.2 IC3.15 | length 26.6
  Top Layer w0.356: IC1.2 25.219,29.464 25.678,29.923 25.986,29.923 v1(26.035,29.972) ; IC3.15 42.243,44.021 v1(42.291,44.069)
  Bottom Layer w0.356: v1(26.035,29.972) 26.035,30.041 25.933,30.142 25.933,31.801 38.201,44.069 v1(42.291,44.069)
K13_CTRL_2: IC1.3 IC3.14 | length 24.7
  Top Layer w0.356: IC1.3 25.908,30.734 v1(26.67,31.496) ; v1(43.434,41.021) 43.473,41.06 43.473,42.472 IC3.14
  Bottom Layer w0.356: v1(26.67,31.496) 36.271,41.097 41.876,41.097 41.952,41.021 v1(43.434,41.021)
K13_N: IC1.8 K1.8 K3.8 | length 37.1
  Top Layer w0.254: IC1.8 19.594,27.491 19.812,27.273 v1(19.812,27.178)
  Bottom Layer w0.254: v1(19.812,27.178) 19.812,15.762 20.066,15.508 25.894,15.508 27.94,13.462 29.691,13.462 29.722,13.493 32.699,13.493 K3.8 34.63,13.462 35.306,13.462 35.337,13.493 41.183,13.493 K1.8
K13_P: IC1.6 K1.1 K3.1 | length 39.5
  Top Layer w0.254: v1(17.78,30.734) IC1.6
  Bottom Layer w0.254: v1(17.78,30.734) 19.126,29.388 19.126,22.403 19.186,22.343 19.186,15.358 19.544,15 24.299,15 26.787,12.512 K3.1 31.461,11.531 35.392,11.531 36.373,12.512 K1.1
K24_CTRL_1: IC2.2 IC3.13 | length 37.1
  Top Layer w0.356: IC2.2 25.998,23.273 26.093,23.368 v1(26.162,23.368) ; v1(44.323,44.069) 44.783,43.609 IC3.13
  Bottom Layer w0.356: v1(26.162,23.368) 27.559,24.765 27.559,31.115 36.932,40.488 41.624,40.488 42.614,39.497 43.815,39.497 44.323,40.005 v1(44.323,44.069)
K24_CTRL_2: IC2.3 IC3.12 | length 34.7
  Top Layer w0.254: IC2.3 26.575,24.543 29.591,27.559 29.591,33.401 30.226,33.401 31.01,32.617 31.449,32.617 v1(32.385,33.553) ; v1(41.656,37.084) 43.434,37.084 v1(45.339,38.989) ; v1(45.974,40.894) 46.013,40.933 46.013,42.472 IC3.12
  Bottom Layer w0.254: v1(32.385,33.553) 38.125,33.553 v1(41.656,37.084) ; v1(45.339,38.989) 45.974,39.624 v1(45.974,40.894)
K24_N: IC2.8 K2.8 K4.8 | length 21.1
  Top Layer w0.254: v1(18.5,20.627) 18.5,20.724 18.64,20.864 18.64,21.805 18.838,22.003 IC2.8
  Bottom Layer w0.254: v1(18.5,20.627) 18.5,16.5 16.5,14.5 16.5,13.032 16.764,12.768 K4.8 18.252,14 23.912,14 K2.8
K24_P: IC2.6 K2.1 K4.1 | length 25.1
  Top Layer w0.254: v1(17.78,24.638) 17.876,24.638 17.993,24.522 19.491,24.522 IC2.6
  Bottom Layer w0.254: v1(17.78,24.638) 17.78,16.728 K4.1 14.545,11.531 17.388,11.531 18.369,12.512 K2.1
Net5V_PWR_1: 5V_LED.1 R22.1 | length 1.8
  Top Layer w0.356: R22.1 5V_LED.1
Net12V_PWR_1: 12V_LED.1 R21.2 | length 1.8
  Top Layer w0.356: R21.2 12V_LED.1
NetC10_2: C10.2 R13.2 RESET.1 | length 7.5
  Top Layer w0.356: R13.2 RESET.1 52.46,33.02 54.314,31.166 C10.2
NetGAIN_1: GAIN.1 R6.2 R7.2 | length 3.6
  Top Layer w0.381: GAIN.1 R6.2@56.861,10.88 ; R6.2 R7.2
NetGAIN_2: GAIN.2 R9.2 | length 4.1
  Top Layer w0.381: GAIN.2 52,11.535 53.589,13.124 R9.2
NetGAIN_3: GAIN.3 R12.2 | length 2.7
  Top Layer w0.381: R12.2 49.413,13.58 49.46,13.533 GAIN.3
NetIC3_2: IC3.2 R20.2 | length 21.5
  Top Layer w0.254: IC3.2 37.163,33.461 38.159,34.457 38.159,34.603 v1(38.227,34.671) ; v1(52.207,35.301) 52.832,35.925 R20.2
  Bottom Layer w0.254: v1(38.227,34.671) 41.326,37.77 41.94,37.77 43.751,35.958 43.751,35.543 45.563,33.731 50.638,33.731 v1(52.207,35.301)
NetIC3_6: IC3.6 R19.2 SET_CONF.3 | length 40.6
  Top Layer w0.254: IC3.6 42.243,32.461 44.732,29.972 52.114,29.972 52.324,29.762 52.324,27.305 53.34,26.289 60.049,26.289 60.198,26.14 60.198,22.65 61.258,21.59 64.181,21.59 65.653,23.063 65.653,25.641 SET_CONF.3@67.056,27.044 ; R19.2 SET_CONF.3@67.056,27.044 ; SET_CONF.3 SET_CONF.3@67.056,27.044
NetIC3_7: IC3.7 R18.2 SET_CONF.2 | length 34.2
  Top Layer w0.254: IC3.7 43.513,32.461 45.494,30.48 52.324,30.48 52.832,29.972 52.832,27.686 53.594,26.924 60.557,26.924 60.706,26.775 60.706,22.86 61.468,22.098 62.716,22.098 62.865,22.247 62.865,22.86 63.996,23.991 64.343,23.991 64.516,24.164 R18.2 SET_CONF.2
NetIC3_8: IC3.8 R17.2 SET_CONF.1 | length 24.6
  Top Layer w0.254: IC3.8 44.783,32.461 46.256,30.988 52.705,30.988 53.467,30.226 53.467,27.848 53.616,27.699 SET_CONF.1 R17.2
NetIC3_9: IC3.9 R16.2 | length 8.7
  Top Layer w0.254: v1(45.847,34.417) 45.847,33.808 45.855,33.8 45.855,33.159 IC3.9 ; v1(51.435,35.687) 51.816,36.068 R16.2
  Bottom Layer w0.254: v1(45.847,34.417) 50.165,34.417 50.241,34.493 50.322,34.493 50.724,34.895 50.724,34.976 v1(51.435,35.687)
NetIC3_10: IC3.10 R15.2 | length 5.3
  Top Layer w0.254: IC3.10 47.323,33.461 49.727,35.865 50.104,35.865 50.415,36.176 50.415,36.195 50.788,36.567 R15.2
NetIC3_11: IC3.11 R14.2 | length 7.5
  Top Layer w0.254: IC3.11 47.371,42.463 v1(47.371,40.767) ; v1(49.149,36.449) 49.21,36.51 49.723,36.51 R14.2
  Bottom Layer w0.254: v1(47.371,40.767) 47.371,38.227 v1(49.149,36.449)
NetLED1_1: LED1.1 R14.1 | length 3.5
  Top Layer w0.356: R14.1 49.784,38.735 50,38.951 LED1.1
NetLED2_1: LED2.1 R15.1 | length 4.3
  Top Layer w0.356: R15.1 50.8,38.735 51.978,39.913 51.978,40.728 52.25,41 LED2.1
NetLED3_1: LED3.1 R16.1 | length 4.9
  Top Layer w0.356: R16.1 51.828,37.592 51.888,37.652 51.888,38.172 53.594,39.878 53.628,39.878 54.75,41 LED3.1
NetLED4_2: LED4.2 R20.1 | length 5.9
  Top Layer w0.356: R20.1 52.844,37.592 54.876,39.624 56.624,39.624 57.053,40.053 57.128,40.053 57.5,40.425 LED4.2
NetR8_2: R8.2 R9.1 | length 1
  Top Layer w0.381: R9.1 R8.2
NetR10_2: R10.2 R11.1 | length 2.1
  Top Layer w0.356: R11.1 50.733,14.935 50.806,14.935 51.371,14.37 51.371,14.214 51.641,13.945 51.702,13.945 52.058,13.589 R10.2
NetR11_2: R11.2 R12.1 | length 1.5
  Top Layer w0.381: R12.1 49.45,14.558 49.994,14.558 50.239,14.313 50.318,14.313 50.661,13.97 R11.2
"OP1 -": R1.2 R4.1 U1.6 | length 9.9
  Top Layer w0.381: R1.2 40.513,19.584 44.183,23.254 44.252,23.254 44.367,23.368 44.608,23.368 44.722,23.482 44.722,24.46 U1.6 44.873,24.611 44.873,26.628 R4.1
OP1+: R2.2 R5.2 U1.5 | length 24.2
  Top Layer w0.152: R2.2 41.247,15.875 40.993,15.621 39.869,15.621 39.497,15.993 39.497,19.304 42.921,22.728 42.921,26.893 43.328,27.3 45.402,27.3 46.101,26.601 U1.5 46.101,24.144 46.325,23.92 46.55,23.92 47.498,22.973 R5.2
OP1_OUT: R4.2 U1.3 U1.7 | length 8.2
  Top Layer w0.381: R4.2 43.815,25.248 43.561,24.994 U1.7 43.561,24.384 v1(43.942,24.003) ; v1(43.951,21.962) 43.942,21.953 43.942,20.433 44.831,19.544 U1.3
  Bottom Layer w0.381: v1(43.942,24.003) 43.942,21.971 v1(43.951,21.962)
OP2-: R3.2 R6.1 R7.1 R8.1 R10.1 U1.2 | length 20.9
  Top Layer w0.356: U1.2 43.683,18.997 43.683,18.301 44.445,17.538 R3.2 44.445,16.845 44.654,16.637 50.129,16.637 51.495,15.271 51.495,15.177 52.058,14.614 R10.1 52.097,14.641 52.573,14.641 54.197,16.265 R8.1 54.797,16.205 54.87,16.205 56.033,15.042 56.033,13.232 57.023,12.242 R6.1 R7.1
OUT_P: GAIN.4 GAIN.5 GAIN.6 J3.1 U1.1 | length 39.9
  Top Layer w0.203: U1.1 42.291,18.694 42.489,18.496 42.686,18.496 43.144,18.038 43.307,17.875 43.307,16.383 43.942,15.748
  Top Layer w0.356: 43.942,15.748 43.942,13.989 49.46,8.471 GAIN.4 GAIN.5 GAIN.6 58.93,2.27 J3.1
PART2_BR_N: K3.5 K4.6 | length 41.3
  Top Layer w0.381: K4.6 15.609,5.957 13.131,5.957 12.382,5.207 9.017,5.207 9.017,1.651 21.209,1.651 21.463,1.397 29.114,1.397 29.337,1.62 29.337,5.246 30.047,5.957 32.635,5.957 K3.5
PART2_BR_P: K3.4 K4.3 | length 35.8
  Top Layer w0.381: K4.3 13.044,6.592 12.868,6.592 12.119,5.842 8.754,5.842 8.382,5.47 8.382,1.388 8.754,1.016 20.946,1.016 21.2,0.762 29.377,0.762 29.972,1.357 29.972,4.279 30.48,4.787 K3.4
PART_BR_IN_N: K1.5 K2.7 | length 25.4
  Bottom Layer w0.381: K2.7 26.248,9.312 27.559,8.001 27.745,7.815 27.745,1.474 28.008,1.211 38.463,1.211 K1.5
PART_BR_IN_P: K1.4 K2.3 | length 35.7
  Bottom Layer w0.381: K2.3 23.923,7.112 24.967,8.157 26.445,8.157 26.475,8.187 27.11,7.552 27.11,1.211 27.559,0.762 27.745,0.576 39.305,0.576 43.209,4.479 43.209,5.345 42.597,5.957 41.413,5.957 40.369,4.912 K1.4
UDPI: IC3.16 R13.1 UDPI.2 | length 28.4
  Top Layer w0.356: UDPI.2 31.475,41 35.052,44.577 39.407,44.577 40.973,43.011 IC3.16 40.973,39.799 v1(41.021,39.751) ; R13.1 v1(50.038,35.179)
  Bottom Layer w0.356: v1(41.021,39.751) 45.593,35.179 v1(50.038,35.179)
WH_A: K2.6 K4.4 RN1.6 | length 62.3
  Top Layer w0.381: v1(13.462,16.891) 13.505,16.848 17.102,16.848 18.892,18.638 32.473,18.638 32.981,19.146 33.719,19.146 34.002,19.43 34.002,21.718 33.742,21.978 33.591,21.978 33.367,22.202 33.367,22.344 33.233,22.479 RN1.6 ; K4.4 12.7,4.048 12.7,3.017 12.923,2.794 21.336,2.794 22.098,2.032 25.4,2.032 26.766,3.398 26.766,5.746 K2.6
  Bottom Layer w0.381: v1(13.462,16.891) 11.425,14.854 11.425,11.924 12.962,10.387 13.966,10.387 14.609,9.745 14.609,5.957 K4.4
WH_B: K4.5 K4.7 RN1.7 RN1.8 | length 40.5
  Top Layer w0.381: K4.7 16.911,9.312 18.394,10.795 v1(18.542,10.795) ; v1(16.764,17.907) 18.343,19.486 31.925,19.486 32.148,19.709 32.148,19.804 32.283,19.939 RN1.8 RN1.7
  Bottom Layer w0.381: K4.5 15.719,5.957 15.719,8.267 K4.7 ; v1(16.764,17.907) 12.06,13.203 12.06,12.187 13.225,11.022 14.245,11.022 14.473,10.795 v1(18.542,10.795)
WH_VCC: C2.2 C3.2 C4.2 C5.2 C6.2 C7.2 J1.2 K2.4 RN1.1 U1.8 U2.1 | length 112.9
  Top Layer w0.356: C7.2 8.109,22.352 9.136,23.378 9.136,23.873 U2.1@9.283,24.021 ; U2.1 10.283,24.021 10.47,23.834 C2.2 C3.2
  Top Layer w0.381: U2.1 9.283,24.021 9.136,24.021 6.114,24.021 4.953,22.86 1.778,22.86 1.27,22.352 1.27,10.625 J1.2 6.701,10.076 C5.2 10.433,10.057 10.533,10.057 12.434,8.157 18.956,8.157 K2.4 22.225,4.887 22.225,3.741 C6.2@23.072,2.894 ; C6.2 C6.2@23.072,2.894 ; v1(23.749,12.827) 23.749,3.571 C6.2@23.072,2.894 ; v1(35.433,16.256) 38.108,18.931 RN1.1 39.396,19.939 42.291,22.834 U1.8@42.291,24.144 ; C4.2 41.726,23.579 U1.8@42.291,24.144 ; U1.8 U1.8@42.291,24.144
  Bottom Layer w0.381: v1(23.749,12.827) 23.749,12.801 24.355,12.194 24.355,12.079 24.967,11.467 26.707,11.467 26.924,11.684 27.94,11.684 28.067,11.811 29.083,11.811 29.591,11.303 30.607,11.303 31.115,10.795 35.687,10.795 36.576,11.684 37.846,11.684 38.069,11.461 43.211,11.461 43.815,12.065 43.815,14.478 42.926,15.367 36.322,15.367 v1(35.433,16.256)
pads on no net: IC1.9 IC2.9 IC3.3 IC3.4 IC3.5 IC3.17 IC3.18 IC3.19 K2.2 RN1.4 RN1.5 U2.4 U2.5 U3.4

## Polygon pours and split planes (outlines as drawn)
AGND on Top Layer "AGND_L01_P000" (solid, remove dead copper, pour order 0): 50.038,28.956 50.038,19.939 44.704,14.605 44.704,14.351 32.893,14.351 30.607,16.637 30.607,28.956
GND on Top Layer "GND_L01_P003" (solid, remove dead copper, pour order 3): 0,0 0,45 70,45 70,0
AGND on Top Layer "AGND_L01_P001" (solid, pour order 1): 14.859,30.226 14.859,16.51 0,16.51 0,30.226 1.27,30.226 1.016,30.226 1.27,30.226
GND on Bottom Layer "GND_L02_P002" (solid, pour order 2): 0,0 0,45 70,45 70,0

## Other copper
Top Layer:
  text "+" at 11.303,38.862 h1.52
  text "+" at 20.828,38.227 h1.52
Bottom Layer:
  region: 316 vertices and 0 holes, not listed, extent 50.098,4.289 55.791,8.636
  region: 58.413,5.99 53.452,5.99 53.452,6.935 58.957,6.935 58.957,5.99 58.437,5.99
  region: 60.421,7.998 60.421,4.289 59.5,4.289 59.5,7.691 56.712,7.691 56.712,8.636 60.421,8.636 60.421,8.022
  region: 57.516,4.289 52.531,4.289 52.531,4.313 52.507,4.313 52.507,5.211 52.531,5.211 52.531,5.234 58.106,5.234 58.106,4.289 57.539,4.289

## Silkscreen, mask and mechanical layers (free items; w line width, h text height)
Top Overlay:
  drawing of 4 lines, arcs and shapes, not listed
  text "GND" at 31.623,43.053 h1.5
  text "+5" at 31.623,37.846 h1.5
  text "IN" at 3.048,20.574 h3
  text "AGND" at 8.636,17.78 h1.5
  text "OUT" at 63.373,15.621 h3
  text "Universal Wheatstone  / Bridge Amplifier V1.0 / Leon Bazdar" at 13.208,14.859 h2.2
  text "-" at 9.017,13.843 h4
  text "-" at 60.665,12.827 h3
  text "+" at 8.636,9.398 h4
  text "+" at 60.665,8.382 h3
  text "+10V" at 8.636,7.112 h1.5
Outline:
  the board outline again, w0.254